# EAGLE board Carcass (EAGLE 9.7.0)

Size 46 x 35 mm. Coordinates in mm from the lower left corner, seen from the top.
Outline: 39,0 36.4,0 36.4,1.8 31.6,1.8 31.6,0 25.4,0 25.4,1.8 20.6,1.8 20.6,0 14.4,0 14.4,1.8 9.6,1.8 9.6,0 7,0 arc-90 0,7 0,10.6 7,10.6 7,24.4 0,24.4 0,28 arc-90 7,35 39,35 arc-90 46,28 46,7 arc-90 39,0
Copper layers (1+2*63+16): Top / GND / Bottom / layer 63
Stack-up 4 Layer Stack: Top SilkScreen Epoxy Ink / Top SolderMask User Defined 0.02mm Dk 4.3 / Top Surface Finish Lead-Free 0.02mm / Top User Defined 0.03mm / Dielectric-1 User Defined 0.034mm / Dielectric-2 User Defined 0.034mm / GND User Defined 0.03mm / Dielectric-3 User Defined 0.664mm / Power User Defined 0.03mm / Dielectric-4 User Defined 0.034mm / Dielectric-5 User Defined 0.034mm / Bottom User Defined 0.03mm / Bottom Surface Finish Lead-Free 0.02mm / Bottom SolderMask User Defined 0.02mm Dk 4.3 / Bottom SilkScreen Epoxy Ink
Design rules: minimum copper width 5mil, minimum drill size 0.2mm, copper clearance wire_polygon to wire_polygon 5mil, copper clearance wire_polygon to pad_smd 5mil, copper clearance wire_polygon to via 5mil, copper clearance pad_smd to pad_smd 5mil, copper clearance pad_smd to via 5mil, copper clearance via to via 5mil, copper clearance smd to pad (same net) 5mil, copper clearance smd to via (same net) 5mil, copper clearance smd to smd (same net) 5mil, dimension clearance 0.2mm, via restrict clearance 0mil, restrict clearance 0mil, drill distance 6mil, keepout clearance 0mil

## Footprints (pad centres in the part's own frame; a part is rotated, then mirrored left to right if it is on the bottom)
2450AT18B100E_ANTC3216X140N = smd 1.15 x 1.8: 1 -1.5,0; 2 1.5,0
NORDIC_NRF_3_RESC0201_L = smd 0.28 x 0.43: 1 -0.255,0; 2 0.255,0
ESP32_C6_LIBRARY_1_ESP32_WROVER_EAGLE-LTSPICE_C0402 = smd 0.7 x 0.9: 1 -0.65,0; 2 0.65,0
GRM011R60J152KE01L_2_CAPC0201X13N = smd 0.22 x 0.23: 1 -0.185,0; 2 0.185,0
ESP32_C6_LIBRARY_5_SOD3716X135N = smd 1.15 x 0.8: 1 -1.75,0; 2 1.75,0
ESP32_C6_LIBRARY_3_SOT95P280X145-6N = smd 1.2 x 0.6: 1 -1.25,0.95; 2 -1.25,0; 3 -1.25,-0.95; 4 1.25,-0.95; 5 1.25,0; 6 1.25,0.95
BQ25180YBGR_BGA8C40P2X4_100X155X50 = smd 0.2 x 0.2: A1 -0.2,0.6; A2 0.2,0.6; B1 -0.2,0.2; B2 0.2,0.2; C1 -0.2,-0.2; C2 0.2,-0.2; D1 -0.2,-0.6; D2 0.2,-0.6
DRV2605YZFR_BGA9C50P3X3_144X144X62 = smd 0.25 x 0.25: A1 -0.5,0.5; A2 0,0.5; A3 0.5,0.5; B1 -0.5,0; B2 0,0; B3 0.5,0; C1 -0.5,-0.5; C2 0,-0.5; C3 0.5,-0.5
BMA423_BMA423 = smd 0.3 x 0.35: 1 -0.75,-0.775; 2 -0.25,-0.775; 3 0.25,-0.775; 4 0.75,-0.775; 7 0.75,0.775; 8 0.25,0.775; 9 -0.25,0.775; 10 -0.75,0.775 | smd 0.35 x 0.3: 5 0.775,-0.25; 6 0.775,0.25; 11 -0.775,0.25; 12 -0.775,-0.25
RT6160AWSC_BGA15C40P3X5_140X230X60 = smd 0.216 x 0.216: A1 -0.4,0.8; A2 0,0.8; A3 0.4,0.8; B1 -0.4,0.4; B2 0,0.4; B3 0.4,0.4; C1 -0.4,0; C2 0,0; C3 0.4,0; D1 -0.4,-0.4; D2 0,-0.4; D3 0.4,-0.4; E1 -0.4,-0.8; E2 0,-0.8; E3 0.4,-0.8
503480-2400_5034802400 = smd 0.3 x 0.7: 1 -5.75,1.525; 2 -5.25,1.525; 3 -4.75,1.525; 4 -4.25,1.525; 5 -3.75,1.525; 6 -3.25,1.525; 7 -2.75,1.525; 8 -2.25,1.525; 9 -1.75,1.525; 10 -1.25,1.525; 11 -0.75,1.525; 12 -0.25,1.525; 13 0.25,1.525; 14 0.75,1.525; 15 1.25,1.525; 16 1.75,1.525; 17 2.25,1.525; 18 2.75,1.525; 19 3.25,1.525; 20 3.75,1.525; 21 4.25,1.525; 22 4.75,1.525; 23 5.25,1.525; 24 5.75,1.525 | smd 0.3 x 1: MP1 -6.54,-1.125; MP2 6.54,-1.125
TC2030-IDC_TC2030IDC = smd 0.783 x 0.783: 1 -0.953,-0.635; 2 -0.953,0.635; 3 0.317,-0.635; 4 0.317,0.635; 5 1.588,-0.635; 6 1.588,0.635 | hole 2.451: -2.223,-2.54; -2.223,2.54; 0.952,-2.54; 0.952,2.54 | hole 1.067: -2.223,0; 2.857,-1.016; 2.857,1.016
KH-TYPE-C-16P_KINGHELM_KH-TYPE-C-16P = smd 0.6 x 1.15: A1_B12 -3.2,4.725; A4_B9 -2.4,4.725; A9_B4 2.4,4.725; A12_B1 3.2,4.725 | smd 0.3 x 1.15: A5 -1.25,4.725; A6 -0.25,4.725; A7 0.25,4.725; A8 1.25,4.725; B5 1.75,4.725; B6 0.75,4.725; B7 -0.75,4.725; B8 -1.75,4.725 | drill 0.65 pad 1.05: SH1 -4.32,0; SH2 4.32,0; SH3 -4.32,4.15; SH4 4.32,4.15 | hole 0.7: -2.89,3.65; 2.89,3.65
NORDIC_NRF_2_RESC0402_L = smd 0.5 x 0.6: 1 -0.5,0; 2 0.5,0
ESP32_C6_LIBRARY_2_IND_4828-WE-TPC_WRE = smd 0.9 x 5.3: 1 -2.286,0; 2 2.286,0
MLP2016SR47MT0S1_INDC2016X100N = smd 1.2 x 2.2: 1 -1.028,0; 2 1.028,0
ESP32_C6_LIBRARY_4_ESP32_C6_LIBRARY_4_ESP32_C6_LIBRARY_4_ESP32_C6_LIBRARY_4_ESP32_WROVER_SPARKFUN-DISCRETESEMI_SOT23-3 = smd 0.8 x 0.9: 1 -0.95,-1; 2 0.95,-1; 3 0,1.1
ESP32_C6_LIBRARY_6_SOT65P210X110-3N = smd 1.05 x 0.5: 1 -1.05,0.65; 2 -1.05,-0.65; 3 1.05,0
CPF0201D7K68C1_0201 = smd 0.35 x 0.25: 1 0,0.275; 2 0,-0.275
ESP32_C6_LIBRARY_7_JUMPER_SJ = smd 1.168 x 1.6: 1 -0.762,0; 2 0.762,0
2025-10-22_07-23-44_LIBRARY_SW_EVP-AKE31A_PAN = smd 0.711 x 1.092: 1 -1.4,-0.972; 2 1.4,-0.972 | drill 0.559 pad 0.914 square: 3 -1.848,0.381; 4 1.848,0.381 | smd 1.397 x 1.092: 5 0,-1.124
HECTOR_WATCH_1_TP20R = smd 2 x 2: TP 0,0
ESP32_C6_LIBRARY_SON50P200X200X80-9N = smd 0.76 x 0.27: 1 -0.985,0.75; 2 -0.985,0.25; 3 -0.985,-0.25; 4 -0.985,-0.75; 5 0.985,-0.75; 6 0.985,-0.25; 7 0.985,0.25; 8 0.985,0.75 | smd 0.9 x 1.3: 9 0,0
NORDIC_NRF_4_AQFN50P700X700X85_HS-74N = smd 4.85 x 4.85: P$74 0,0 | drill 0.3 pad 0.6: P$75 -1.8,1.8; P$76 -0.6,1.8; P$77 0.6,1.8; P$78 1.8,1.8; P$79 -1.8,0.6; P$80 -0.6,0.6; P$81 0.6,0.6; P$82 1.8,0.6; P$83 -1.8,-0.6; P$84 -0.6,-0.6; P$85 0.6,-0.6; P$86 1.8,-0.6; P$87 -1.8,-1.8; P$88 -0.6,-1.8; P$89 0.6,-1.8; P$90 1.8,-1.8 | smd 0.2 x 0.2: P$A8 -1.25,3.25; P$A10 -0.75,3.25; P$A12 -0.25,3.25; P$A14 0.25,3.25; P$A16 0.75,3.25; P$A18 1.25,3.25; P$A20 1.75,3.25; P$A22 2.25,3.25; P$A23 2.75,3.25; P$AA24 3.25,-2.25; P$AB2 -2.75,-2.5; P$AC5 -2,-2.75; P$AC9 -1,-2.75; P$AC11 -0.5,-2.75; P$AC13 0,-2.75; P$AC15 0.5,-2.75; P$AC17 1,-2.75; P$AC19 1.5,-2.75; P$AC21 2,-2.75; P$AC24 3.25,-2.75; P$AD2 -2.75,-3.25; P$AD4 -2.25,-3.25; P$AD6 -1.75,-3.25; P$AD8 -1.25,-3.25; P$AD10 -0.75,-3.25; P$AD12 -0.25,-3.25; P$AD14 0.25,-3.25; P$AD16 0.75,-3.25; P$AD18 1.25,-3.25; P$AD20 1.75,-3.25; P$AD22 2.25,-3.25; P$AD23 2.75,-3.25; P$B1 -3.25,2.75; P$B3 -2.5,2.75; P$B5 -2,2.75; P$B7 -1.5,2.75; P$B9 -1,2.75; P$B11 -0.5,2.75; P$B13 0,2.75; P$B15 0.5,2.75; P$B17 1,2.75; P$B19 1.5,2.75; P$B24 3.25,2.75; P$C1 -3.25,2.25; P$D2 -2.75,2; P$D23 2.75,2; P$E24 3.25,1.75; P$F2 -2.75,1.5; P$F23 2.75,1.5; P$G1 -3.25,1.25; P$H2 -2.75,1; P$H23 2.75,1; P$J1 -3.25,0.75; P$J24 3.25,0.75; P$K2 -2.75,0.5; P$L1 -3.25,0.25; P$L24 3.25,0.25; P$M2 -2.75,0; P$N1 -3.25,-0.25; P$N24 3.25,-0.25; P$P2 -2.75,-0.5; P$P23 2.75,-0.5; P$R1 -3.25,-0.75; P$R24 3.25,-0.75; P$T2 -2.75,-1; P$T23 2.75,-1; P$U1 -3.25,-1.25; P$U24 3.25,-1.25; P$V23 2.75,-1.5; P$W1 -3.25,-1.75; P$W24 3.25,-1.75; P$Y2 -2.75,-2; P$Y23 2.75,-2
NORDIC_NRF_BT-XTAL_2016_N = smd 0.95 x 0.85: 1 -0.725,-0.575; 2 0.725,-0.575; 3 0.725,0.575; 4 -0.725,0.575
NORDIC_NRF_1_XTAL_3215_N = smd 1 x 1.8: 1 -1.25,0; 2 1.25,0

## Placement (x,y rotation side)
ANT1  2450AT18B100E  [2450AT18B100E_ANTC3216X140N]  25.6,-14.6 0 top  (outside the outline)
C1  12pF  [NORDIC_NRF_3_RESC0201_L]  31.2,-13.5 0 top  (outside the outline)
C1-EP-DR  10µF  [ESP32_C6_LIBRARY_1_ESP32_WROVER_EAGLE-LTSPICE_C0402]  35.8,-13.7 0 top  (outside the outline)
C2  12pF  [NORDIC_NRF_3_RESC0201_L]  78.7,-13.5 0 top  (outside the outline)
C2-EP-DR  4.7µF/25V  [ESP32_C6_LIBRARY_1_ESP32_WROVER_EAGLE-LTSPICE_C0402]  83.3,-13.7 0 top  (outside the outline)
C3  1pF  [NORDIC_NRF_3_RESC0201_L]  5.2,-18.8 0 top  (outside the outline)
C4  1pF  [NORDIC_NRF_3_RESC0201_L]  42,-18.8 0 top  (outside the outline)
C5  100nF  [NORDIC_NRF_3_RESC0201_L]  54.9,-18.8 0 top  (outside the outline)
C6  4.7µF  [ESP32_C6_LIBRARY_1_ESP32_WROVER_EAGLE-LTSPICE_C0402]  59.4,-19 0 top  (outside the outline)
C7  100nF  [NORDIC_NRF_3_RESC0201_L]  64,-18.8 0 top  (outside the outline)
C8  100nF  [NORDIC_NRF_3_RESC0201_L]  67.7,-18.8 0 top  (outside the outline)
C9  820pF N.C.  [NORDIC_NRF_3_RESC0201_L]  71.3,-18.8 0 top  (outside the outline)
C10  N.C.  [NORDIC_NRF_3_RESC0201_L]  40.4,-13.5 0 top  (outside the outline)
C11  100pF  [NORDIC_NRF_3_RESC0201_L]  44.1,-13.5 0 top  (outside the outline)
C12  100nF  [NORDIC_NRF_3_RESC0201_L]  47.7,-13.5 0 top  (outside the outline)
C13  N.C.  [NORDIC_NRF_3_RESC0201_L]  51.3,-13.5 0 top  (outside the outline)
C14  4.7µF  [ESP32_C6_LIBRARY_1_ESP32_WROVER_EAGLE-LTSPICE_C0402]  55.9,-13.7 0 top  (outside the outline)
C15  1.0µF  [NORDIC_NRF_3_RESC0201_L]  60.5,-13.5 0 top  (outside the outline)
C16  47nF  [NORDIC_NRF_3_RESC0201_L]  64.2,-13.5 0 top  (outside the outline)
C17  12pF  [NORDIC_NRF_3_RESC0201_L]  67.8,-13.5 0 top  (outside the outline)
C18  12pF  [NORDIC_NRF_3_RESC0201_L]  71.4,-13.5 0 top  (outside the outline)
C19  100nF  [NORDIC_NRF_3_RESC0201_L]  75.1,-13.5 0 top  (outside the outline)
C20  4.7µF  [ESP32_C6_LIBRARY_1_ESP32_WROVER_EAGLE-LTSPICE_C0402]  88.8,-13.7 0 top  (outside the outline)
C21  4.7µF  [ESP32_C6_LIBRARY_1_ESP32_WROVER_EAGLE-LTSPICE_C0402]  94.4,-13.7 0 top  (outside the outline)
C22  N.C.  [NORDIC_NRF_3_RESC0201_L]  99,-13.5 0 top  (outside the outline)
C23  0.1uF  [GRM011R60J152KE01L_2_CAPC0201X13N]  -16.9,-18.9 0 top  (outside the outline)
C24  10µF  [ESP32_C6_LIBRARY_1_ESP32_WROVER_EAGLE-LTSPICE_C0402]  -12.3,-19 0 top  (outside the outline)
C25  22µF  [ESP32_C6_LIBRARY_1_ESP32_WROVER_EAGLE-LTSPICE_C0402]  -6.8,-19 0 top  (outside the outline)
C27  0.1uF  [GRM011R60J152KE01L_2_CAPC0201X13N]  -2.1,-18.9 0 top  (outside the outline)
C29  1uF  [GRM011R60J152KE01L_2_CAPC0201X13N]  1.5,-18.9 0 top  (outside the outline)
C30  1uF  [GRM011R60J152KE01L_2_CAPC0201X13N]  8.9,-18.9 0 top  (outside the outline)
C31  1uF  [GRM011R60J152KE01L_2_CAPC0201X13N]  12.5,-18.9 0 top  (outside the outline)
C32  1uF  [GRM011R60J152KE01L_2_CAPC0201X13N]  16.2,-18.9 0 top  (outside the outline)
C33  22µF  [ESP32_C6_LIBRARY_1_ESP32_WROVER_EAGLE-LTSPICE_C0402]  20.8,-19 0 top  (outside the outline)
C34  0.1uF  [GRM011R60J152KE01L_2_CAPC0201X13N]  25.4,-18.9 0 top  (outside the outline)
C37  1uF  [GRM011R60J152KE01L_2_CAPC0201X13N]  29.1,-18.9 0 top  (outside the outline)
C38  1uF  [GRM011R60J152KE01L_2_CAPC0201X13N]  32.8,-18.9 0 top  (outside the outline)
C39  10µF  [ESP32_C6_LIBRARY_1_ESP32_WROVER_EAGLE-LTSPICE_C0402]  37.4,-19 0 top  (outside the outline)
C42  0.1uF  [GRM011R60J152KE01L_2_CAPC0201X13N]  45.7,-18.9 0 top  (outside the outline)
C43  4.7µF  [ESP32_C6_LIBRARY_1_ESP32_WROVER_EAGLE-LTSPICE_C0402]  50.3,-19 0 top  (outside the outline)
D2  MBR0530  [ESP32_C6_LIBRARY_5_SOD3716X135N]  77,-20.2 0 top  (outside the outline)
D3  USBLC6-2SC6Y  [ESP32_C6_LIBRARY_3_SOT95P280X145-6N]  84.3,-20.3 0 top  (outside the outline)
D4  MBR0530  [ESP32_C6_LIBRARY_5_SOD3716X135N]  91.5,-20.2 0 top  (outside the outline)
D5  MBR0530  [ESP32_C6_LIBRARY_5_SOD3716X135N]  99.3,-20.2 0 top  (outside the outline)
EPD_C1  1uF/50V  [NORDIC_NRF_3_RESC0201_L]  -16.9,-25 0 top  (outside the outline)
EPD_C2  1uF/50V  [NORDIC_NRF_3_RESC0201_L]  -2.4,-25 0 top  (outside the outline)
EPD_C5  1uF/50V  [NORDIC_NRF_3_RESC0201_L]  1.3,-25 0 top  (outside the outline)
EPD_C6  1uF/50V  [NORDIC_NRF_3_RESC0201_L]  4.9,-25 0 top  (outside the outline)
EPD_C7  1uF/50V  [NORDIC_NRF_3_RESC0201_L]  8.6,-25 0 top  (outside the outline)
EPD_C8  1uF/50V  [NORDIC_NRF_3_RESC0201_L]  12.2,-25 0 top  (outside the outline)
EPD_C9  1uF/50V  [NORDIC_NRF_3_RESC0201_L]  15.8,-25 0 top  (outside the outline)
EPD_C10  1uF/50V  [NORDIC_NRF_3_RESC0201_L]  -13.3,-25 0 top  (outside the outline)
EPD_C11  1uF/50V  [NORDIC_NRF_3_RESC0201_L]  -9.6,-25 0 top  (outside the outline)
EPD_C12  1uF/50V  [NORDIC_NRF_3_RESC0201_L]  -6,-25 0 top  (outside the outline)
IC1  BQ25180YBGR  [BQ25180YBGR_BGA8C40P2X4_100X155X50]  20.4,-26.3 0 top  (outside the outline)
IC2  DRV2605YZFR  [DRV2605YZFR_BGA9C50P3X3_144X144X62]  26.3,-26.4 0 top  (outside the outline)
IC3  BMA421  [BMA423_BMA423]  32.6,-26.6 0 top  (outside the outline)
IC9  RT6160AWSC  [RT6160AWSC_BGA15C40P3X5_140X230X60]  38.9,-26.7 0 top  (outside the outline)
J1  503480-2400  [503480-2400_5034802400]  9.1,17.5 270 top
J2  TC2030-IDC  [TC2030-IDC_TC2030IDC]  48.3,-29.6 0 top  (outside the outline)
J4  KH-TYPE-C-16P  [KH-TYPE-C-16P_KINGHELM_KH-TYPE-C-16P]  23,33.7 180 top
L1  3.9nH  [NORDIC_NRF_2_RESC0402_L]  58.7,-25.1 0 top  (outside the outline)
L2  10µH  [NORDIC_NRF_2_RESC0402_L]  63.1,-25.1 0 top  (outside the outline)
L3  15nH  [NORDIC_NRF_2_RESC0402_L]  67.4,-25.1 0 top  (outside the outline)
L5  68uH  [ESP32_C6_LIBRARY_2_IND_4828-WE-TPC_WRE]  79.1,-29.9 0 top  (outside the outline)
L7  FTC252012SR47MBCA  [MLP2016SR47MT0S1_INDC2016X100N]  88.1,-25.8 0 top  (outside the outline)
Q1  DMG2305UX-7 20V/4.2A/52mΩ/1.4W  [ESP32_C6_LIBRARY_4_ESP32_C6_LIBRARY_4_ESP32_C6_LIBRARY_4_ESP32_C6_LIBRARY_4_ESP32_WROVER_SPARKFUN-DISCRETESEMI_SOT23-3]  93.9,-26.2 0 top  (outside the outline)
Q3  SI1308EDL-T1-GE3  [ESP32_C6_LIBRARY_6_SOT65P210X110-3N]  99.8,-26 0 top  (outside the outline)
R1  0  [CPF0201D7K68C1_0201]  -17.4,-38.2 0 top  (outside the outline)
R1_EP_DR  0.47  [CPF0201D7K68C1_0201]  -8.7,-38.2 0 top  (outside the outline)
R1_USB  5K1  [CPF0201D7K68C1_0201]  -5.8,-38.2 0 top  (outside the outline)
R2  0  [CPF0201D7K68C1_0201]  -2.9,-38.2 0 top  (outside the outline)
R2_EP_DR  10K  [CPF0201D7K68C1_0201]  -0.1,-38.2 0 top  (outside the outline)
R2_USB  5K1  [CPF0201D7K68C1_0201]  2.8,-38.2 0 top  (outside the outline)
R3  0  [CPF0201D7K68C1_0201]  5.7,-38.2 0 top  (outside the outline)
R5  10K  [CPF0201D7K68C1_0201]  8.6,-38.2 0 top  (outside the outline)
R7  10K  [CPF0201D7K68C1_0201]  11.5,-38.2 0 top  (outside the outline)
R8  10K  [CPF0201D7K68C1_0201]  14.4,-38.2 0 top  (outside the outline)
R9  10K  [CPF0201D7K68C1_0201]  17.3,-38.2 0 top  (outside the outline)
R17  3K3  [CPF0201D7K68C1_0201]  -14.5,-38.2 0 top  (outside the outline)
R18  3K3  [CPF0201D7K68C1_0201]  -11.6,-38.2 0 top  (outside the outline)
R_PWR_EPD  0  [CPF0201D7K68C1_0201]  20.2,-38.2 0 top  (outside the outline)
R_TYPE_SEL  2.2  [CPF0201D7K68C1_0201]  23.1,-38.2 0 top  (outside the outline)
SJ1  [ESP32_C6_LIBRARY_7_JUMPER_SJ]  27.6,-39 0 top  (outside the outline)
SW_DW  C30  [2025-10-22_07-23-44_LIBRARY_SW_EVP-AKE31A_PAN]  47,-50.4 0 top  (outside the outline)
SW_ENT  C30  [2025-10-22_07-23-44_LIBRARY_SW_EVP-AKE31A_PAN]  85,-50.4 0 top  (outside the outline)
SW_UP  C30  [2025-10-22_07-23-44_LIBRARY_SW_EVP-AKE31A_PAN]  -2.4,-79.7 0 top  (outside the outline)
TP_3V3  HECTOR_WATCH_1_TPTP20R  [HECTOR_WATCH_1_TP20R]  21.6,-68.3 0 top  (outside the outline)
TP_BAT_GND  HECTOR_WATCH_1_TPTP20R  [HECTOR_WATCH_1_TP20R]  26.1,-68.3 0 top  (outside the outline)
TP_ON  HECTOR_WATCH_1_TPTP20R  [HECTOR_WATCH_1_TP20R]  30.7,-68.3 0 top  (outside the outline)
TP_OP  HECTOR_WATCH_1_TPTP20R  [HECTOR_WATCH_1_TP20R]  35.2,-68.3 0 top  (outside the outline)
TP_SCL  HECTOR_WATCH_1_TPTP20R  [HECTOR_WATCH_1_TP20R]  39.7,-68.3 0 top  (outside the outline)
TP_SDA  HECTOR_WATCH_1_TPTP20R  [HECTOR_WATCH_1_TP20R]  44.3,-68.3 0 top  (outside the outline)
TP_VBAT  HECTOR_WATCH_1_TPTP20R  [HECTOR_WATCH_1_TP20R]  48.8,-68.3 0 top  (outside the outline)
TP_VREG  HECTOR_WATCH_1_TPTP20R  [HECTOR_WATCH_1_TP20R]  53.4,-68.3 0 top  (outside the outline)
U3  MAX17048G+T10  [ESP32_C6_LIBRARY_SON50P200X200X80-9N]  69.9,-68.6 0 top  (outside the outline)
U$1  NRF52840_QF  [NORDIC_NRF_4_AQFN50P700X700X85_HS-74N]  61.4,-71.1 0 top  (outside the outline)
X1  32MHz  [NORDIC_NRF_BT-XTAL_2016_N]  75.8,-68.6 0 top  (outside the outline)
X2  32.768kHz  [NORDIC_NRF_1_XTAL_3215_N]  81.8,-68.5 0 top  (outside the outline)

## Library data of the parts
ANT1 = InkTime_v5; ARROW_PART_NUMBER: 2450AT18B100E; ARROW_PRICE-STOCK: https://www.arrow.com/en/products/2450at18b100e/johanson-dielectrics?utm_currency=USD&region=nac; DESCRIPTION: Antennas 2.45GHz ANTENNA; HEIGHT: 1.4mm; MANUFACTURER_NAME: JOHANSON TECHNOLOGY; MANUFACTURER_PART_NUMBER: 2450AT18B100E; MOUSER_PART_NUMBER: 609-2450AT18B100E; MOUSER_PRICE-STOCK: https://www.mouser.co.uk/ProductDetail/Johanson-Technology/2450AT18B100E?qs=yCnrNFeXz%252Bh5MFsFIXGZGA%3D%3D
C1-C5 C7-C13 C15-C19 C22 EPD_C1 EPD_C2 EPD_C5-EPD_C12 L1-L3 R1 R1_EP_DR R1_USB R2 R2_EP_DR R2_USB R3 R5 R7-R9 R17 R18 R_PWR_EPD R_TYPE_SEL SJ1 TP_3V3 TP_BAT_GND TP_ON TP_OP TP_SCL TP_SDA TP_VBAT TP_VREG U$1 X1 X2 = InkTime_v5
C1-EP-DR C2-EP-DR C6 C14 C20 C21 C24 C25 C33 C39 C43 = InkTime_v5; SPICEMODEL: NONE; SPICEPREFIX: C
C23 C27 C29-C32 C34 C37 C38 C42 = InkTime_v5; AVAILABILITY: In Stock; CHECK_PRICES: https://www.snapeda.com/parts/GRM011R60J152KE01L/Murata/view-part/?ref=eda; DESCRIPTION: SMD Capacitor X5R(EIA) with Capacitance: 1500pF Tol. 10%. Rated Voltage: 6.3Vdc; MF: Murata; MP: GRM011R60J152KE01L; PACKAGE: 0201 Murata; PRICE: None; SNAPEDA_LINK: https://www.snapeda.com/parts/GRM011R60J152KE01L/Murata/view-part/?ref=snap
D2 D4 D5 = InkTime_v5; AVAILABILITY: In Stock; CHECK_PRICES: https://www.snapeda.com/parts/MBR0530/Onsemi/view-part/?ref=eda; DESCRIPTION: Diode Schottky 30 V 500mA Surface Mount SOD-123; MF: ON Semiconductor; MP: MBR0530; PACKAGE: SOD-123-2 ON Semiconductor; PRICE: None; PURCHASE-URL: https://www.snapeda.com/api/url_track_click_mouser/?unipart_id=179458&manufacturer=ON Semiconductor&part_name=MBR0530&search_term=None; SNAPEDA_LINK: https://www.snapeda.com/parts/MBR0530/Onsemi/view-part/?ref=snap
D3 = InkTime_v5; AVAILABILITY: In Stock; CHECK_PRICES: https://www.snapeda.com/parts/USBLC6-2SC6Y/STMicroelectronics/view-part/?ref=eda; DESCRIPTION: 17V Clamp 5A (8/20µs) Ipp Tvs Diode Surface Mount SOT-23-6; MF: STMicroelectronics; MP: USBLC6-2SC6Y; PACKAGE: SOT-23-6 STMicroelectronics; PRICE: None; SNAPEDA_LINK: https://www.snapeda.com/parts/USBLC6-2SC6Y/STMicroelectronics/view-part/?ref=snap
IC1 = InkTime_v5; ARROW_PART_NUMBER: BQ25180YBGR; ARROW_PRICE-STOCK: https://www.arrow.com/en/products/bq25180ybgr/texas-instruments?utm_currency=USD&region=nac; DESCRIPTION: Charger IC Lithium Ion/Polymer, Lithium Iron Phosphate 8-DSBGA (1.6x1.1); HEIGHT: 0.5mm; MANUFACTURER_NAME: Texas Instruments; MANUFACTURER_PART_NUMBER: BQ25180YBGR; MOUSER_PART_NUMBER: 595-BQ25180YBGR; MOUSER_PRICE-STOCK: https://www.mouser.co.uk/ProductDetail/Texas-Instruments/BQ25180YBGR?qs=doiCPypUmgEWjAK%252BJAX6Tw%3D%3D
IC2 = InkTime_v5; ARROW_PART_NUMBER: DRV2605YZFR; ARROW_PRICE-STOCK: https://www.arrow.com/en/products/drv2605yzfr/texas-instruments?region=nac; DESCRIPTION: Haptic Driver for ERM/LRA with Built-In Library and Smart Loop Architecture; HEIGHT: 0.625mm; MANUFACTURER_NAME: Texas Instruments; MANUFACTURER_PART_NUMBER: DRV2605YZFR
IC3 = InkTime_v5; ARROW_PART_NUMBER: BMA423; ARROW_PRICE-STOCK: https://www.arrow.com/en/products/bma423/bosch; DESCRIPTION: Accelerometers Triaxial low-g 12bit Acceleration Sensor; HEIGHT: 1mm; MANUFACTURER_NAME: BOSCH; MANUFACTURER_PART_NUMBER: BMA423; MOUSER_PART_NUMBER: 262-BMA423; MOUSER_PRICE-STOCK: https://www.mouser.co.uk/ProductDetail/Bosch-Sensortec/BMA423?qs=HXFqYaX1Q2xC%252BSgeGoX3mg%3D%3D
IC9 = InkTime_v5; DESCRIPTION: Buck-Boost Regulator Positive Output Step-Up/Step-Down I2C DC-DC Controller IC 15-WL-CSP (BSC) (1.4x2.3); HEIGHT: 0.6mm; MANUFACTURER_NAME: RICHTEK; MANUFACTURER_PART_NUMBER: RT6160AWSC; MOUSER_PART_NUMBER: 835-RT6160AWSC; MOUSER_PRICE-STOCK: https://www.mouser.co.uk/ProductDetail/Richtek/RT6160AWSC?qs=amGC7iS6iy%2FLd9PSoixZXQ%3D%3D
J1 = InkTime_v5; DESCRIPTION: FFC & FPC Connectors 0.5mm FPC RA SMT Dual Contact 24Ckt; HEIGHT: 1.87mm; MANUFACTURER_NAME: Molex; MANUFACTURER_PART_NUMBER: 503480-2400; MOUSER_PART_NUMBER: 538-503480-2400; MOUSER_PRICE-STOCK: https://www.mouser.co.uk/ProductDetail/Molex/503480-2400?qs=OAhjpuo3Vu7efIoxFh9AOw%3D%3D
J2 = InkTime_v5; DESCRIPTION: CABLE ADAPTER 6 POS; HEIGHT: 19mm; MANUFACTURER_NAME: Tag Connect; MANUFACTURER_PART_NUMBER: TC2030-IDC
J4 = InkTime_v5; AVAILABILITY: Not in stock; CHECK_PRICES: https://www.snapeda.com/parts/KH-TYPE-C-16P/Kinghelm/view-part/?ref=eda; MF: kinghelm; MP: KH-TYPE-C-16P; PACKAGE: None; PRICE: None; SNAPEDA_LINK: https://www.snapeda.com/parts/KH-TYPE-C-16P/Kinghelm/view-part/?ref=snap
L5 = InkTime_v5; COPYRIGHT: Copyright (C) 2024 Ultra Librarian. All rights reserved.; MANUFACTURER_PART_NUMBER: 744043680; MFR_NAME: Wurth Electronics
L7 = InkTime_v5; DESCRIPTION: SMD / SMT Inductors (Coils), L=0.47?H, L x W x T :; HEIGHT: 1mm; JLCPCB: https://jlcpcb.com/partdetail/6763488-FTC252012SR47MBCA/C5832368; MANUFACTURER_NAME: TDK; MANUFACTURER_PART_NUMBER: FTC252012SR47MBCA
Q1 = InkTime_v5; PROD_ID: TRAN-14388
Q3 = InkTime_v5; AVAILABILITY: In Stock; CHECK_PRICES: https://www.snapeda.com/parts/SI1308EDL-T1-GE3/Vishay+Siliconix/view-part/?ref=eda; DESCRIPTION: Si1308EDL-T1-GE3 N-channel MOSFET Transistor, 1.5 A, 30 V, 3-Pin SC-70 | Siliconix / Vishay SI1308EDL-T1-GE3; MF: Vishay Siliconix; MP: SI1308EDL-T1-GE3; PACKAGE: SOT-323 Vishay Semiconductor; PRICE: None; PURCHASE-URL: https://www.snapeda.com/api/url_track_click_mouser/?unipart_id=274603&manufacturer=Vishay Siliconix&part_name=SI1308EDL-T1-GE3&search_term=None; SNAPEDA_LINK: https://www.snapeda.com/parts/SI1308EDL-T1-GE3/Vishay+Siliconix/view-part/?ref=snap
SW_DW SW_ENT SW_UP = InkTime_v5; COPYRIGHT: Copyright (C) 2025 Ultra Librarian. All rights reserved.; DIGI-KEY_PART_NUMBER_1: P123437TR-ND; DIGI-KEY_PART_NUMBER_2: P123437CT-ND; DIGI-KEY_PART_NUMBER_3: P123437DKR-ND; MANUFACTURER_NAME: Panasonic; MANUFACTURER_PART_NUMBER: EVP-AKE31A
U3 = InkTime_v5; AVAILABILITY: In Stock; CHECK_PRICES: https://www.snapeda.com/parts/MAX17048G+T10/Analog+Devices/view-part/?ref=eda; DESCRIPTION: 3µA 1-Cell/2-Cell Fuel Gauge with ModelGauge; MF: Analog Devices; MP: MAX17048G+T10; PACKAGE: TDFN-8 Maxim; PRICE: None; PURCHASE-URL: https://www.snapeda.com/api/url_track_click_mouser/?unipart_id=329239&manufacturer=Analog Devices&part_name=MAX17048G+T10&search_term=None; SNAPEDA_LINK: https://www.snapeda.com/parts/MAX17048G+T10/Analog+Devices/view-part/?ref=snap

## Nets
3V3/1.7D: C34.2 IC2.C2 Q1.2 R5.2 R7.2 R8.2 R_PWR_EPD.2
3V3/2.4A: C19.1 C25.1 C33.1 IC3.7 IC3.10 IC9.E2 IC9.E3 J2.1 R17.1 R18.1 TP_3V3.TP
ALERT/1.6C: U3.5
D+/2.7D: U$1.P$AD6
D-/2.7D: U$1.P$AD4
EPD_3V3: C1-EP-DR.1 EPD_C5.2 J1.15 J1.16 L5.2 Q1.3
EPD_BUSY/1.5D: J1.9
EPD_CS/1.4C: J1.12
EPD_CS/2.2D: U$1.P$K2
EPD_DC/1.5D: J1.11
EPD_RST/1.5D: J1.10
GDR: J1.2 Q3.1 R2_EP_DR.2
GND: C1-EP-DR.2 C1.2 C2.2 C3.2 C4.2 C5.2 C6.2 C7.2 C8.2 C9.2 C10.2 C11.2 C12.2 C13.2 C14.2 C15.2 C16.2 C17.1 C18.1 C19.2 C20.2 C21.2 C22.2 C23.2 C24.1 C25.2 C27.1 C29.1 C30.1 C31.1 C32.1 C33.2 C34.1 C37.1 C38.1 C39.2 C42.2 C43.2 D3.2 D4.1 EPD_C1.1 EPD_C2.1 EPD_C5.1 EPD_C6.1 EPD_C7.1 EPD_C8.1 EPD_C9.1 EPD_C10.1 EPD_C11.1 EPD_C12.1 IC1.D2 IC2.B1 IC2.B3 IC3.8 IC3.9 IC9.B1 IC9.C1 IC9.C2 IC9.C3 J1.8 J1.17 J1.MP1 J1.MP2 J2.3 J2.5 J4.A1_B12 J4.A12_B1 J4.SH1 J4.SH2 J4.SH3 J4.SH4 R1_USB.1 R2_EP_DR.1 R2_USB.2 R3.1 R9.1 R_TYPE_SEL.1 SJ1.1 SW_DW.1 SW_ENT.1 SW_UP.1 TP_BAT_GND.TP U3.1 U3.4 U3.6 U3.9 U$1.P$74 U$1.P$75 U$1.P$76 U$1.P$77 U$1.P$78 U$1.P$79 U$1.P$80 U$1.P$81 U$1.P$82 U$1.P$83 U$1.P$84 U$1.P$85 U$1.P$86 U$1.P$87 U$1.P$88 U$1.P$89 U$1.P$90 U$1.P$B7 U$1.P$F23 X1.2 X1.4
HAPTIC_EN/1.4C: IC2.A1
HAPTIC_EN/2.6A: U$1.P$U1
IMU_INT1: IC3.5
IMU_INT2: IC3.6
LX1: IC9.B2 IC9.B3 L7.1
LX2: IC9.D2 IC9.D3 L7.2
MOSI/1.5B: J1.14
N$2: IC3.1 R3.2
N$3: C2-EP-DR.2 D5.2 L5.1 Q3.3
N$4: IC3.3
N$5: C2-EP-DR.1 D2.1 D4.2
N$6: IC9.D1 R1.2
N$7: IC1.D1 R9.2
N$9: IC9.E1 R2.2
N$10: U$1.P$L1
N$11: U$1.P$M2
N$12: U$1.P$N1
N$13: U$1.P$P2
N$14: U$1.P$R1
N$15: U$1.P$T2
N$17: C20.1 U$1.P$AC5
N$18: C6.1 U$1.P$W1 U$1.P$Y2
N$20: C17.2 U$1.P$D2 X2.1
N$21: C5.1 U$1.P$C1
N$22: C14.1 U$1.P$B1
N$23: L2.2 L3.1
N$24: U$1.P$A14
N$25: U$1.P$B13
N$26: U$1.P$A12
N$27: U$1.P$B11
N$28: U$1.P$A10
N$29: U$1.P$B9
N$30: L2.1 U$1.P$B3
N$31: C2.1 U$1.P$A23 X1.3
N$32: C13.1 U$1.P$A18
N$33: C12.1 U$1.P$A22
N$34: C11.1 U$1.P$D23
N$35: C10.1 C15.1 C16.1 L3.2 U$1.P$B5 U$1.P$E24
N$36: C1.1 U$1.P$B24 X1.1
N$37: U$1.P$AC9
N$38: ANT1.1 C4.1 C22.1 L1.2
N$39: U$1.P$AD10
N$40: U$1.P$R24
N$41: C8.1 U$1.P$AD23
N$42: U$1.P$P23
N$43: C9.1 U$1.P$N24
N$44: U$1.P$L24
N$45: U$1.P$J24
N$46: C3.1 L1.1 U$1.P$H23
N$47: U$1.P$W24
N$48: U$1.P$AC11
N$49: U$1.P$AD12
N$50: U$1.P$AC13
N$51: C7.1 U$1.P$AD14
N$52: U$1.P$AC19
N$53: U$1.P$AD20
N$54: U$1.P$AC21
N$55: U$1.P$AD22
N$56: C21.1 U$1.P$AD2
N$57: Q3.2 R1_EP_DR.2
N$58: J2.2
N$60: R1_EP_DR.1 R_TYPE_SEL.2 SJ1.2
N$66: EPD_C2.2 J1.4
N$67: EPD_C1.2 J1.5
N$69: EPD_C6.2 J1.18
N$70: EPD_C7.2 J1.19
N$71: EPD_C8.2 J1.20
N$73: EPD_C10.2 J1.22
N$75: EPD_C12.2 J1.24
N$80: C32.2 IC2.A2
N$83: TP_VBAT.TP
N$90: J4.A5 R1_USB.2
N$91: J4.A6
N$92: J4.A7
N$93: J4.B5 R2_USB.1
N$94: C42.1 C43.1
N$95: D3.6
N$96: D3.5
N$97: D3.4
N$98: D3.3
N$99: D3.1
N$100: J4.B6
N$101: J4.B7
N$102: J4.A4_B9 J4.A9_B4
N$103: TP_OP.TP
N$104: TP_ON.TP
OUT+: IC2.A3
OUT-: IC2.C3
P0.01/XL2: C18.2 U$1.P$F2 X2.2
P0.04: U$1.P$J1
P0.13/1.5D: C30.2 R5.1 SW_UP.2
P0.13/2.6C: U$1.P$AD8
P0.14/1.5D: C31.2 R8.1 SW_ENT.2
P0.19: U$1.P$AC15
P0.20: U$1.P$AD16
P0.21: U$1.P$AC17
P0.22: U$1.P$AD18
P0.26: U$1.P$G1
P0.27: U$1.P$H2
P0.31: U$1.P$A8
P1.01/1.6C: Q1.1 R_PWR_EPD.1
P1.01/2.4B: U$1.P$Y23
P1.02/1.6C: C29.2 R7.1 SW_DW.2
P1.03: U$1.P$V23
P1.04: U$1.P$U24
P1.05: U$1.P$T23
P1.10: U$1.P$A20
P1.11: U$1.P$B19
P1.12: U$1.P$B17
P1.13: U$1.P$A16
P1.14: U$1.P$B15
PMIC_INT: IC1.A1
PREVGH: D5.1 EPD_C9.2 J1.21
PREVGL: D2.2 EPD_C11.2 J1.23
RESET: J1.3 J2.6
SCK/1.5B: J1.13
SCL/1.4C: IC2.C1 U3.7
SCL/2.4C: IC1.B1 IC3.12 R1.1 R17.2 TP_SCL.TP
SDA/1.4C: IC2.B2 U3.8
SDA/2.4C: IC1.C1 IC3.2 R2.1 R18.2 TP_SDA.TP
SWDCLK: J2.4 U$1.P$AA24
SWDIO: U$1.P$AC24
VBAT/1.2A: C27.2 U3.2 U3.3
VBAT/2.5C: C37.2 IC1.C2
VBUS/2.6D: C38.2 IC1.A2
VREG: C23.1 C24.2 C39.1 IC1.B2 IC9.A1 IC9.A2 IC9.A3 TP_VREG.TP

## Tracks (layer width: path | path; a pad name or v marks a point on that pad's centre or on a via)
3V3/1.7D  (6 unrouted)
3V3/2.4A  (10 unrouted)
EPD_3V3  (5 unrouted)
GDR  (2 unrouted)
GND  (106 unrouted)
LX1  (2 unrouted)
LX2  (2 unrouted)
N$2  (1 unrouted)
N$3  (3 unrouted)
N$5  (2 unrouted)
N$6  (1 unrouted)
N$7  (1 unrouted)
N$9  (1 unrouted)
N$17  (1 unrouted)
N$18  (2 unrouted)
N$20  (2 unrouted)
N$21  (1 unrouted)
N$22  (1 unrouted)
N$23  (1 unrouted)
N$30  (1 unrouted)
N$31  (2 unrouted)
N$32  (1 unrouted)
N$33  (1 unrouted)
N$34  (1 unrouted)
N$35  (5 unrouted)
N$36  (2 unrouted)
N$38  (3 unrouted)
N$41  (1 unrouted)
N$43  (1 unrouted)
N$46  (2 unrouted)
N$51  (1 unrouted)
N$56  (1 unrouted)
N$57  (1 unrouted)
N$60  (2 unrouted)
N$66  (1 unrouted)
N$67  (1 unrouted)
N$69  (1 unrouted)
N$70  (1 unrouted)
N$71  (1 unrouted)
N$73  (1 unrouted)
N$75  (1 unrouted)
N$80  (1 unrouted)
N$90  (1 unrouted)
N$93  (1 unrouted)
N$94  (1 unrouted)
N$102  (1 unrouted)
P0.01/XL2  (2 unrouted)
P0.13/1.5D  (2 unrouted)
P0.14/1.5D  (2 unrouted)
P1.01/1.6C  (1 unrouted)
P1.02/1.6C  (2 unrouted)
PREVGH  (2 unrouted)
PREVGL  (2 unrouted)
RESET  (1 unrouted)
SCL/1.4C  (1 unrouted)
SCL/2.4C  (4 unrouted)
SDA/1.4C  (1 unrouted)
SDA/2.4C  (4 unrouted)
SWDCLK  (1 unrouted)
VBAT/1.2A  (2 unrouted)
VBAT/2.5C  (1 unrouted)
VBUS/2.6D  (1 unrouted)
VREG  (7 unrouted)
(copper drawn outside any net)
  shapes: Bottom area x1